# Altium PCB ebox_board.PcbDoc
Units mil, origin at the board's own origin, x right, y up, seen from the top; angles counter-clockwise.
Board outline 4260.03 x 3260.03 mil, 2 copper layers (Top Layer, Bottom Layer); 35 components, 18 nets, 88 pads, 8 vias.
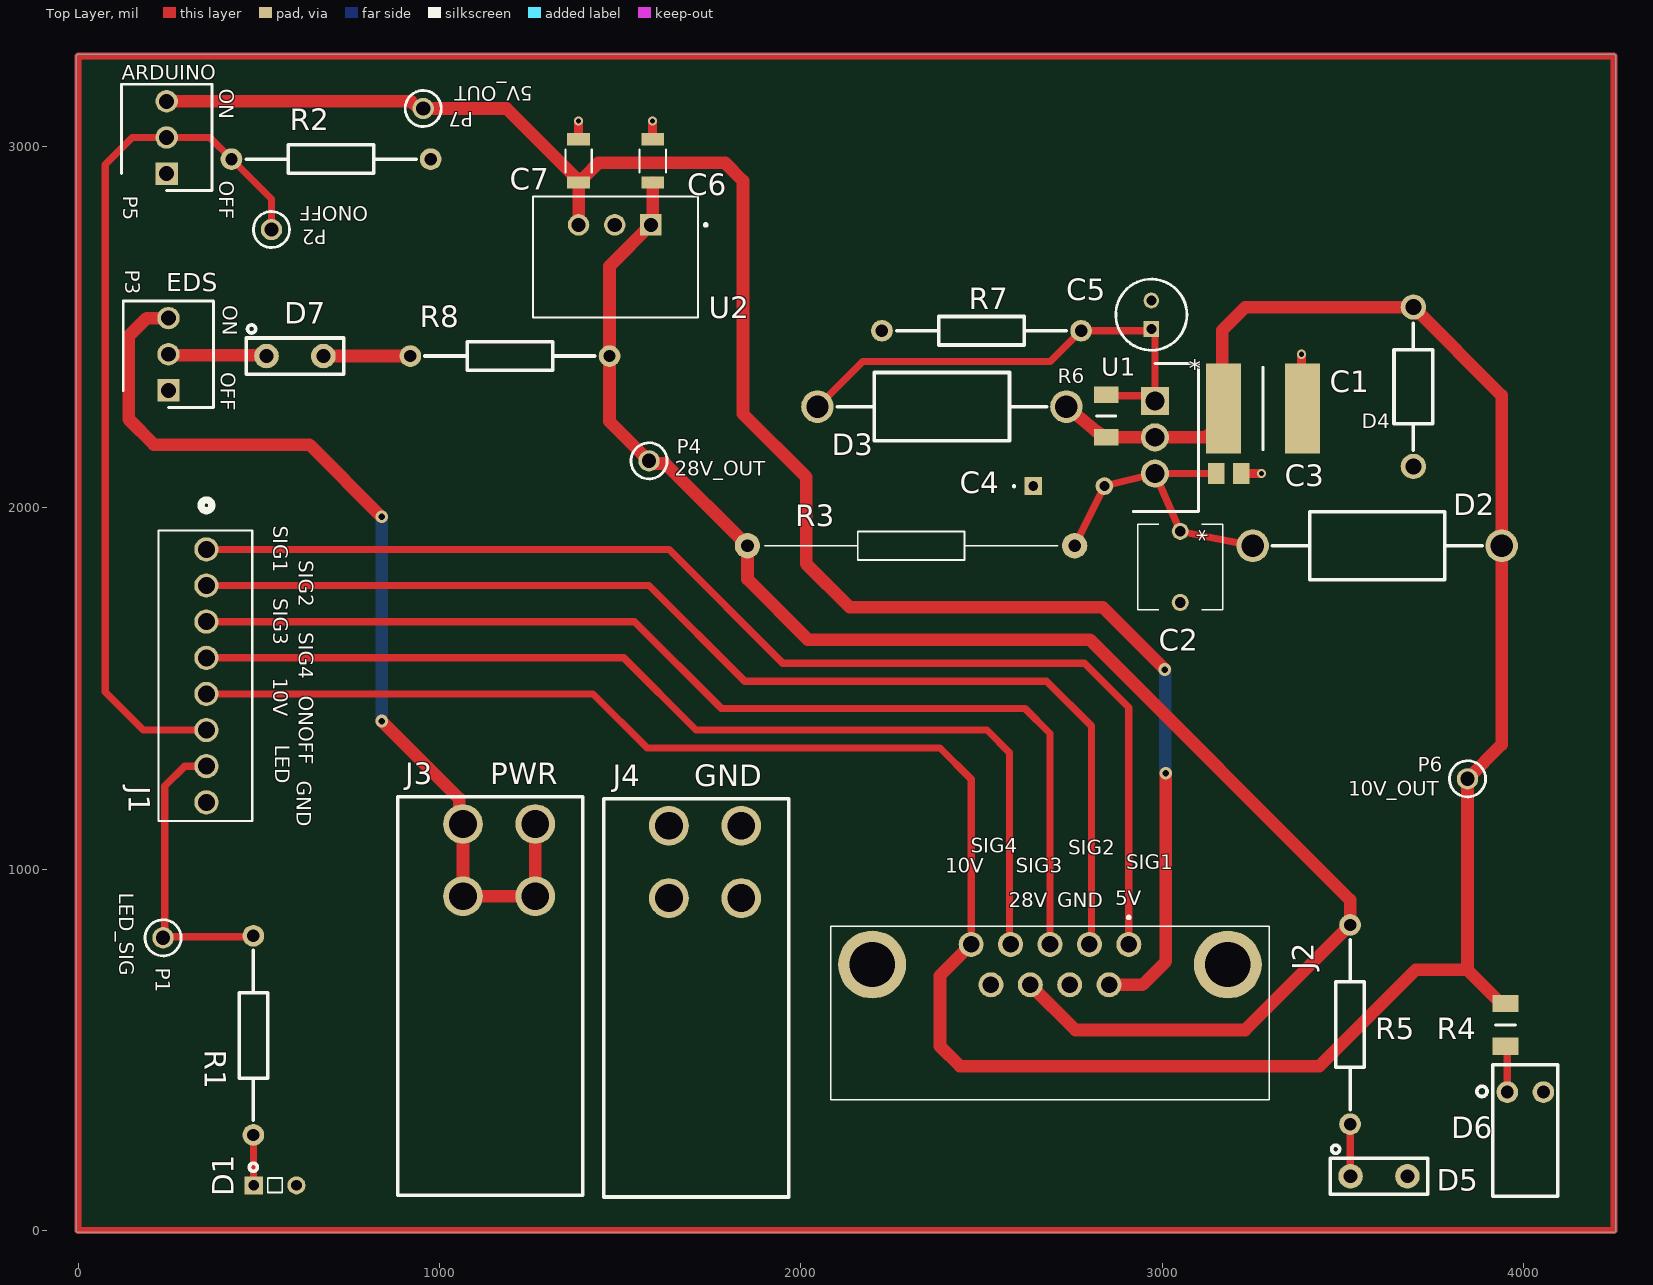
[diagram p0: Top Layer view]
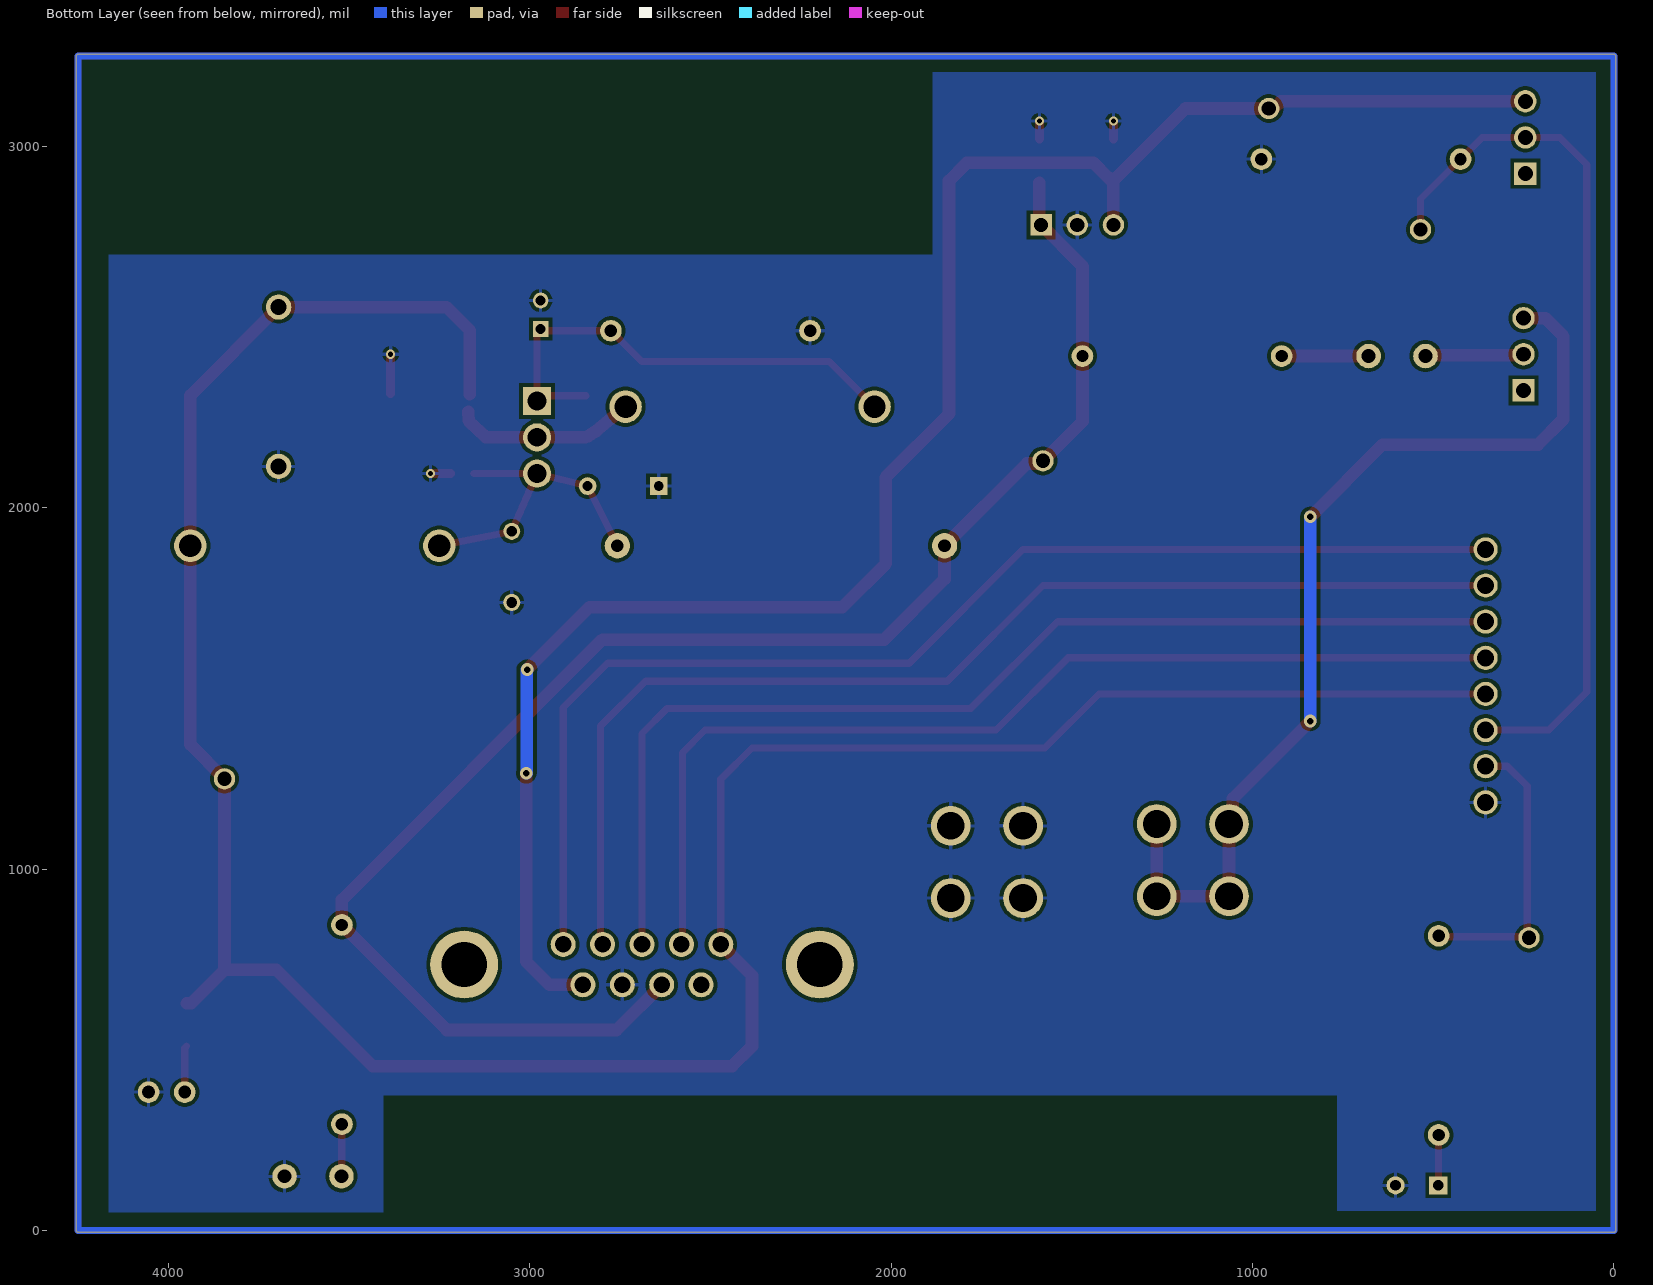
[diagram p1: Bottom Layer view, seen from below]

## Layer stack, top to bottom
Top Solder: solder mask 0.4, Solder Resist, Dk 3.5
Top Layer: signal copper 1.4
Dielectric 1: dielectric 12.6, FR-4, Dk 4.8
Bottom Layer: signal copper 1.4
Bottom Solder: solder mask 0.4, Solder Resist, Dk 3.5

## Board outline
0,-5.01 cw(c0,0) -5.01,0 -5.01,3250 cw(c0,3250) 0,3255.02 4250,3255.02 cw(c4250,3250) 4255.02,3250 4255.02,0 cw(c4250,0) 4250,-5.01

## Design rules (kind name [scope] priority, off if disabled: settings)
Clearance [All] p1: gap=10 ignorepadtopadclearanceinfootprint=FALSE except(0: Arc-Hole Track-Hole SMDPad-Hole THPad-Hole Via-Hole Fill-Hole Poly-Hole Region-Hole Text-Hole)
PolygonConnect [All] p1: connectstyle=Relief reliefconductorwidth=10 reliefentries=4 polygonreliefangle="90 Angle" airgapwidth=10
RoomDefinition top_ebox [InComponentClass('top_ebox')] p1: confinementstyle=ConfineIn formatcopy=TRUE lockcomponents=FALSE outline 90,70 3350,70 3350,3195 90,3195
RoomDefinition U_power_ebox [InComponentClass('U_power_ebox')] p2: confinementstyle=ConfineIn formatcopy=TRUE lockcomponents=FALSE outline 890,80 4110,80 4110,3170 890,3170
RoutingVias [All] p1: holewidth=28 width=50 viastyle="Through Hole" minholewidth=28 minwidth=50 maxholewidth=28 maxwidth=50
SolderMaskExpansion [All] p1: expansion=4 istentingtop=FALSE
Width [All] p1 off: maxlimit=10 minlimit=10 preferedwidth=10
30 further rules are at their usual default settings.

## Classes and differential pairs
component class U_power_ebox: C1 C2 C3 C4 C5 C6 C7 D2 D3 D4 D5 D6 P6 P7 R3 R4 R5 R6 R7 U1 U2
component class top_ebox: D1 D7 J1 J2 J3 J4 P1 P2 P3 P4 P5 R1 R2 R8

## Components (designator, comment, footprint, x,y, rotation, side; value= is the part's Value field where it differs from the comment)
C1 "100u" "100UF TANTALUM" 3279.06,2275 r0 top
C2 "10u" "10UF TANTALUM" 3050,1935 r270 top
C3 "0.1u" "0.1uF Cer SMD" 3184.65,2095 r180 top
C4 "1u" 1UF 2643.15,2060 r0 top
C5 "10u" "10UF ELECTROLYTIC" 2970,2495 r90 top
C6 "10u" "10uF Cer SMD" 1590,2960 r270 top
C7 "10u" "10uF Cer SMD" 1385,2960 r270 top
D1 "LED" "LED 5V ARDUINO THRU HOLE" 545,125 r0 top
D2 "Diode" "PROTECTIVE DIODE" 3595,1895 r180 top
D3 "Diode" "PROTECTIVE DIODE" 2390.51,2280 r0 top
D4 "STPS1L60RL" SCHOTTKY 3695,2335 r90 top
D5 "LED" "LED 12V THRU HOLE" 3600,150 r0 top
D6 "LED" "LED 5V THRU HOLE" 4005,210 r90 top
D7 "LED" "LED 12V THRU HOLE" 600,2420 r0 top
J1 "ARDUINO_IO" "1X8 MOLEX HEADER - FEMALE" 355,1885 r270 top
J2 "EBOX_OUT" "9-PIN D-SUB" 2907.64,791.81 r0 top
J3 "PWR" "BANANA JACK" 1065,1125 r90 top
J4 "GND" "BANANA JACK" 1635,1120 r90 top
P1 "LED_SIG" KSTN-5003 235,810 r90 top
P2 "ONOFF" KSTN-5003 535,2770 r0 top
P3 "EDS" "3X1 KK MOLEX" 250,2325 r90 top
P4 "28V_OUT" KSTN-5003 1580,2130 r0 top
P5 "ARDUINO" "3X1 KK MOLEX" 245,2925 r90 top
P6 "10V_OUT" KSTN-5003 3845,1250 r0 top
P7 "5V_OUT" KSTN-5003 955,3105 r0 top
R1 "220" "GENERAL RESISTOR" 485,540 r90 top
R2 "1.5k" "GENERAL RESISTOR" 700,2965 r180 top
R3 "1.5" "1.5 OHM" 2305,1895 r180 top
R4 "340" "340 OHM" 3950,569.06 r270 top
R5 "1.5k" "GENERAL RESISTOR" 3520,570 r270 top
R6 "249" "249 OHM" 2845,2254.06 r90 top
R7 "Variable Resistor" "GENERAL RESISTOR" 2500,2490 r180 top
R8 "1.5k" "GENERAL RESISTOR" 1195,2420 r180 top
U1 "LM317BT" LM317(B)T 2980,2295.39 r270 top
U2 "R-78E5.0-1.0" "STEP-DOWN CONVERTER" 1485,2694.41 r180 top

## Footprints (in the part's own frame and the unit in brackets; to place one, negate y for a bottom-side part, rotate by r counter-clockwise, add the part's x,y. Pads: shape width x height; smd on the part's side, far side on the other; paste and mask are expansions set on the pad)
"0.1uF Cer SMD" [mm] "CAPC2012X94N"
  rect 1.16x1.47 smd: 1(-0.88,0) 2(0.88,0)
  body extent -1,-0.63 1,0.63, height 0.94
"1.5 OHM" [mil] "PR01000101508JR500"
  round 70 hole 35: 1(-452.76,0) 2(452.76,0)
  silkscreen extent -405,-39 405,39
1UF [mm] "FG28"
  rect 1.25x1.25 hole 0.7: 1(0,0)
  round 1.25 hole 0.7: 2(5,0)
  silkscreen extent -1.4,-0.05 -1.3,0.05, body extent -0.25,-1.25 5.25,1.25, height 5.6
"1X8 MOLEX HEADER - FEMALE" [mil] "CONN_171856-0008_MOL"
  round 67 hole 47 mask+0: 1(0,0) 2(100,0) 3(200,0) 4(300,0) 5(400,0) 6(500,0) 7(600,0) 8(700,0)
  silkscreen extent -137,-133 752,127, body extent 0,0 10,10, height 10
"3X1 KK MOLEX" [mm] "22112032 - HDRV3W87P0X254_1X3_747X635X1105P"
  rect 1.575x1.575 hole 1.05: 1(0,0)
  round 1.575 hole 1.05: 2(2.54,0) 3(5.08,0)
  silkscreen extent -1.19,-3.17 6.27,3.18, body extent -1.19,-3.24 6.27,3.11, height 10.65
"9-PIN D-SUB" [mm] "23117651"
  round 1.755 hole 1.17: 1(0,0) 2(-2.77,0) 3(-5.54,0) 4(-8.31,0) 5(-11.08,0) 6(-1.385,-2.84) 7(-4.155,-2.84) 8(-6.925,-2.84) 9(-9.695,-2.84)
  round 4.77 hole 3.18: MH1(-18.04,-1.42) MH2(6.96,-1.42)
  silkscreen extent -20.95,-10.92 9.86,2, body extent -20.95,-16.92 9.87,1.28, height 12.63
"10uF Cer SMD" [mm] "CAP_CL31_SAM"
  rect 0.856x1.6 smd paste+0 mask+0: 1(-1.528,0) 2(1.528,0)
  silkscreen extent -0.79,-0.93 0.79,0.93, body extent 0,0 0.25,0.25, height 0.25
"10UF ELECTROLYTIC" [mm] "CAPPRD200W52D500H1250"
  rect 1.1x1.1 hole 0.7: 1(0,0)
  round 1.1 hole 0.7: 2(2,0)
  silkscreen extent -1.5,-2.5 3.5,2.5, body extent -1.75,-2.75 3.75,2.75, height 12.5
"10UF TANTALUM" [mm] "TAP106K035CRW"
  round 1.2 hole 0.75: 1(0,0) 2(5,0)
  silkscreen extent -0.5,-3 5.5,3, body extent -0.5,-3 5.5,3, height 11.6
"100UF TANTALUM" [mm] "CAPC7360X200N"
  rect 2.47x6.32 smd: 1(-2.77,0) 2(2.77,0)
  silkscreen extent 0,-2.9 0,2.9, body extent -3.65,-3 3.65,3, height 2
"249 OHM" [mm] "RESC3216X70N"
  rect 1.15x1.7 smd: 1(-1.5,0) 2(1.5,0)
  silkscreen extent 0,-0.67 0,0.67, body extent -1.6,-0.77 1.6,0.77, height 0.7
"340 OHM" [mm] "RESC3216X75N"
  rect 1.2x1.8 smd: 1(-1.5,0) 2(1.5,0)
  silkscreen extent 0,-0.7 0,0.7, body extent -1.6,-0.8 1.6,0.8, height 0.75
"BANANA JACK" [mil] "Female"
  round 110 hole 77: 1(0,0) 2(0,-200) 3(-200,-200) 4(-200,0)
  silkscreen extent -1027,-332 75,180
"GENERAL RESISTOR" [mil]
  round 60 hole 34.17: 1(-275.59,0) 2(275.59,0)
  silkscreen extent -235,-39 235,39
KSTN-5003 [mm] "Test Point, Through Hole, Dia 2.54mm"
  round 1.5 hole 1: 1(0,0)
  silkscreen extent -1.27,-1.27 1.27,1.27, body extent -1.27,-1.27 1.27,1.27, height 4.57
"LED 5V ARDUINO THRU HOLE" [mm]
  rect 1.27x1.27 hole 0.754: 1(-1.5,0)
  round 1.27 hole 0.754: 2(1.5,0)
  silkscreen extent -1.81,-0.51 0.51,1.55
"LED 5V THRU HOLE" [mil] "WP934EW/GD5V"
  round 60 hole 35.43: 1(173,50) 2(173,-50)
  silkscreen extent -115,-90 249,134
"LED 12V THRU HOLE" [mil] "609-1112-130F"
  round 67.99 hole 38: 1(-78.74,0) 2(78.74,0)
  silkscreen extent -135,-50 135,86
LM317(B)T [mm] "TO255P460X1020X2008-3P"
  rect 1.98x1.98 hole 1.32: 1(0,0)
  round 1.98 hole 1.32: 2(2.55,0) 3(5.1,0)
  silkscreen extent -2.65,-1.53 7.75,3.07, body extent -2.55,-1.53 7.65,3.07, height 19.21
"PROTECTIVE DIODE" [mil] "1n5400"
  round 90 hole 62: 1(-344.49,0) 2(344.49,0)
  silkscreen extent -290,-94 290,94
SCHOTTKY [mil] "STPS1L60RL"
  round 70 hole 44: 1(-220.47,0) 2(220.47,0)
  silkscreen extent -175,-53 175,53
"STEP-DOWN CONVERTER" [mm] "CONV_R-78E5.0-1.0"
  rect 1.508x1.508 hole 1: 1(-2.54,-2.25)
  round 1.508 hole 1: 2(0,-2.25) 3(2.54,-2.25)
  silkscreen extent -6.5,-4.25 5.75,4.25

## Part data
C1 C2: library part "Capacitor - Polarized"
C3 C4 C6 C7: library part "Capacitor - Ceramic"
C5: library part "Capacitor - Polarized", "Electrolytic"
D4: library part Schottky, Mfr_Name=STMicroelectronics, Copyright="Copyright (C) 2021 Ultra Librarian. All rights reserved.", Digi-Key_Part_Number_1=497-16205-2-ND, Digi-Key_Part_Number_2=497-16205-1-ND, Manufacturer_Part_Number=STPS1L60RL, RefDes=RefDes, Type=DEV
J1: library part 207843-0008, "KK Molex 1x8 Header", Manufacturer_Name=Molex, Mouser Part Number=538-207843-0008, Datasheet Link=https://www.molex.com/pdm_docs/sd/2078430008_sd.pdf, Height=6.95mm, Manufacturer_Part_Number=207843-0008, Mouser Price/Stock=https://www.mouser.co.uk/ProductDetail/Molex/207843-0008?qs=XeJtXLiO41QJV3n1oae5pg%3D%3D
J2: library part 2311765-1, "Connector", Manufacturer_Name="TE Connectivity", Mouser2 Part Number=571-2311765-1, Datasheet Link=https://componentsearchengine.com//2311765-1.pdf, Height=12.8mm, Manufacturer_Part_Number=2311765-1, Mouser2 Price/Stock=https://www.mouser.com/Search/Refine.aspx?Keyword=571-2311765-1
J3 J4: library part "Banana Jack", "Female"
P1 P2 P4 P6 P7: library part CMP-002-00037-2, "Test Point, Orange, Height 4.6 mm, Tail Length 3 mm, 1-Pin THD, RoHS", Case/Package=5003, Colour=Orange, Manufacturer=Keystone, Package Description="1-Pin Through Hole Device, Dia 2.54 mm", Package Quantity=10, Connector Type=TestPoint, Contact Material=Bronze, Contact Plating=Tin, Datasheet URL=http://keyelco.com/userAssets/file/M65p56.pdf, Datasheet Version=Jun-15, Diameter=2.54mm, Manufacturer URL=http://www.keyelco.com/, Mounting Technology=TH, Package Reference=5003, Packaging=Bulk, Pins=1, RoHS Compliant=True
P3 P5: library part "KK 254 1x3 male header", "22112032"
R1 R2 R3 R4 R5 R6 R8: library part Resistor
U1: library part "Linear Regulator"
U2: library part "Step-down Converter"

## Via types
v1: diameter 25, hole 14, Top Layer to Bottom Layer, tented both sides, 4 vias
v2: diameter 35, hole 18, Top Layer to Bottom Layer, tented both sides, 4 vias

## Nets (pads, with @x,y where several pads share a name; then routed paths per layer and width w, separated by ;. In a path a pad name is that pad's centre, name@x,y a point inside that pad or via, vN(x,y) a via of type N, cw(c..) or ccw(c..) an arc to the next point about the centre after c; other vN are vias at no path point)
5V: C7.2 J2.6 P5.3 P7.1 U2.3 | length 5076.2
  Top Layer w20: P7.1@941.73,3105 P7.1
  Top Layer w35: P5.3 921.73,3125 P7.1@941.73,3105 ; P7.1 1185.45,3105 C7.2@1379.46,2910.99 ; U2.3 C7.2 ; C7.2@1385.66,2900.51 1399.65,2914.5 1399.65,2914.65 1440,2955 1790,2955 1840,2905 1840,2260 2015,2085 2015,1845 2135,1725 2835,1725 v2(3007.5,1552.5) ; J2.6 2945,680 3010,745 v2(3010,1265)
  Bottom Layer w35: v2(3007.5,1552.5) 3008.75,1551.25 3008.75,1266.25 v2(3010,1265)
10V: C1.1 D2.1 D3.2 D4.2 J1.5 J2.5 P6.1 R4.1 R6.1 U1.2 | length 7936.5
  Top Layer w20: J1.5 1425,1485 1575,1335 2385,1335 2471.42,1248.58 J2.5
  Top Layer w35: J2.5 2385,705.39 2385,510 2440,455 3435,455 3701.3,721.3 3845,721.3 ; D3.2 2816.54,2212.64 R6.1 U1.2 3047.32,2195.28 3121.53,2195.59 3169.25,2240.47 C1.1@3170,2265 ; C1.1@3165.94,2315 3165.94,2490.94 3230.47,2555.47 D4.2 3939.49,2310.98 D2.1 3939.49,1344.49 P6.1 3845,721.3 ; R4.1@3949.29,628.82 3937.48,628.82 3845,721.3
28V: J3.1 J3.2 J3.3 J3.4 P3.3 | length 2715.7
  Top Layer w30: J3.1@1054.29,1135.71 J3.1
  Top Layer w35: P3.3 190,2525 140,2475 140,2245 210,2175 640,2175 v2(840,1975) ; v2(840,1410) 1054.29,1195.71 J3.1@1054.29,1135.71 ; J3.1 J3.4 J3.3 J3.2
  Bottom Layer w35: v2(840,1410) v2(840,1975)
28V_OUT: C6.2 J2.8 P4.1 R3.2 R5.1 R8.1 U2.1 | length 4495.3
  Top Layer w35: U2.1 1590,2787.99 C6.2 ; U2.1@1589.81,2787.8 1470.59,2668.58 R8.1 1470.59,2239.41 P4.1 1587.28,2122.72 1624.53,2122.72 R3.2 1852.24,1802.76 2020,1635 2800,1635 3520,915 R5.1 3229.41,555 2760,555 J2.8
GND: C1.2 C2.2 C3.1 C4.1 C5.2 C6.1 C7.1 D1.2 D4.1 D5.2 D6.2 J1.8 J2.7 J4.1 J4.2 J4.3 J4.4 R2.1 R7.2 U2.2 | length 263.7
  Top Layer w25: C7.1 v1(1385,3070) ; C6.1 v1(1590,3070.15) ; C3.1 v1(3275,2095) ; C1.2@3385,2316.89 v1(3385,2425)
LED: J1.7 P1.1 R1.2 | length 808.2
  Top Layer w20: P1.1 P1.1@237.8,812.8 ; J1.7 295,1285 240,1230 240,815 P1.1@237.8,812.8 ; R1.2 482.2,812.8 P1.1@237.8,812.8
NetC2_1: C2.1 C3.2 C4.2 D2.2 R3.1 U1.3 | length 882.3
  Top Layer w20: R3.1 C4.2 U1.3 ; C3.2@3155,2095 U1.3 ; D2.2 C2.1 U1.3
NetC5_1: C5.1 D3.1 R6.2 R7.1 U1.1 | length 1356.5
  Top Layer w20: D3.1 2171.02,2405 2690.59,2405 R7.1 2953.35,2490 C5.1 2980,2485 U1.1 2965.39,2310 R6.2@2845,2310
NetD1_1: D1.1 R1.1 | length 139.8
  Top Layer w20: R1.1 485.47,263.94 485.47,125.47 D1.1
NetD5_1: D5.1 R5.2 | length 146
  Top Layer w20: R5.2@3519.23,295.18 R5.2 3520.63,293.78 3520.63,150.63 D5.1
NetD6_1: D6.1 R4.2 | length 129.1
  Top Layer w20: R4.2 3955,505 D6.1
NetD7_1: D7.1 P3.2 | length 273.3
  Top Layer w35: P3.2 252.5,2422.5 518.76,2422.5 D7.1
NetD7_2: D7.2 R8.2 | length 240.7
  Top Layer w35: D7.2 R8.2
ONOFF: J1.6 P2.1 P5.2 R2.2 | length 2429.6
  Top Layer w20: J1.6 180,1385 75,1490 75,2950 150,3025 P5.2 364.41,3025 R2.2 535,2854.41 P2.1
SIG1: J1.1 J2.1 | length 3389.5
  Top Layer w20: J1.1 1635,1885 1950,1570 2785,1570 2907.64,1447.36 J2.1
SIG2: J1.2 J2.2 | length 3217.2
  Top Layer w20: J1.2 1580,1785 1845,1520 2680,1520 2804.73,1395.27 2804.73,797.96 J2.2
SIG3: J1.3 J2.3 | length 3046.4
  Top Layer w20: J1.3 1540,1685 1780,1445 2620,1445 2689.53,1375.47 J2.3
SIG4: J1.4 J2.4 | length 2863.2
  Top Layer w20: J1.4 1510,1585 1710,1385 2515,1385 2577.73,1322.27 2577.73,794.56 J2.4
pads on no net: J2.9 J2.MH1 J2.MH2 P3.1 P5.1

## Polygon pours and split planes (outlines as drawn)
GND on Bottom Layer "GND_L02_P000" (solid, pour order 0): 50,3205 50,55 765,55 765,375 2000,375 3405,375 3405,50 4165,50 4165,2700 1885,2700 1885,3205

## Other copper
Multi-Layer:
  lines w20: 0,0 0,3250 4250,3250 4250,0 0,0

## Silkscreen, mask and mechanical layers (free items; w line width, h text height)
Top Overlay:
  text "ON" at 390,3160 h40 r270
  text "OFF" at 390,2905 h40 r270
  text "ON" at 400,2560 h40 r270
  text "OFF" at 395,2375 h40 r270
  text "SIG1" at 540.01,1950 h40 r270
  text "SIG2" at 610.01,1855 h40 r270
  text "SIG3" at 540,1750 h40 r270
  text "SIG4" at 610,1655 h40 r270
  text "10V" at 540,1530 h40 r270
  text "ONOFF" at 610,1480 h40 r270
  text "LED" at 545,1345 h40 r270
  text "GND" at 605.01,1245 h40 r270
  text "SIG4" at 2470,1045 h40
  text "SIG2" at 2740,1040 h40
  text "SIG1" at 2900,1000 h40
  text "10V" at 2400,990 h40
  text "SIG3" at 2595,990 h40
  text "5V" at 2870,900 h40
  text "28V" at 2575,895 h40
  text "GND" at 2710,895 h40

## Text inside footprints (layer, text, board x,y; h text height)
C1: Top Overlay "*" at 3074.06,2360 h50
C2: Top Overlay "*" at 3075,1940 h50 r270